# EAGLE board sensorBoard (EAGLE 7.6.0)
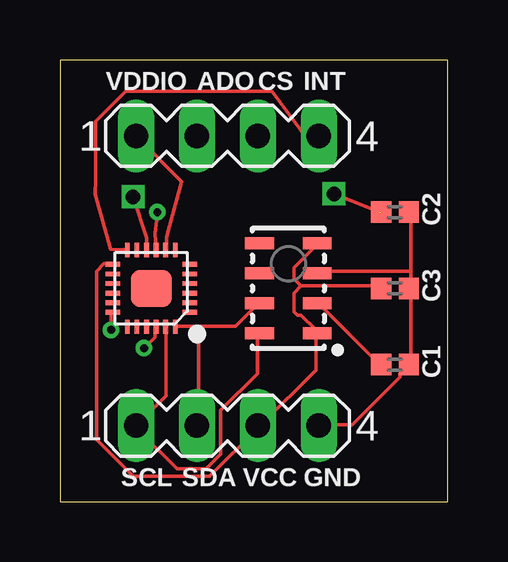
[diagram p0: board, top side]
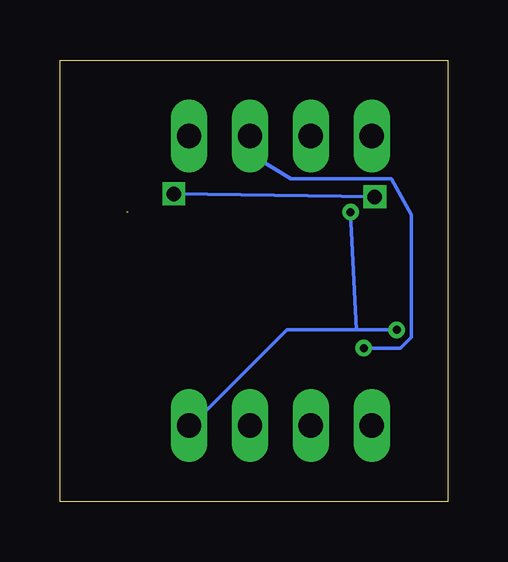
[diagram p1: board, bottom side, seen from below]

Size 16.18 x 18.41 mm. Coordinates in mm from the lower left corner, seen from the top.
Outline: 0,0 16.18,0 16.18,18.41 0,18.41 0,0
Copper layers (1*16): Top 0.0356mm / dielectric 1.5011mm / Bottom 0.0356mm
Design rules "LaenPCBOrder": minimum track width 6mil, minimum drill 13mil, track to track 6mil, track to pad 6mil, pad to pad 6mil, via to via 6mil, smd to smd 6mil, copper to edge 15mil, drill to drill 6mil, minimum pad ring 7mil, minimum via ring 7mil, stop-mask expansion 3mil, vias tented up to drill 0mil, thermal gap 10mil

## Footprints (pad centres in the part's own frame; a part is rotated, then mirrored left to right if it is on the bottom)
0402 = smd 0.85 x 0.9: 1 -0.58,0; 2 0.58,0
MA04-1 = drill 1.016 long: 1 -3.81,0; 2 -1.27,0; 3 1.27,0; 4 3.81,0
LGA-8 = smd 1.2 x 0.5: 1 -1.2,1.875; 2 -1.2,0.625; 3 -1.2,-0.625; 4 -1.2,-1.875; 5 1.2,-1.875; 6 1.2,-0.625; 7 1.2,0.625; 8 1.2,1.875
LEAD-QFN24 = smd 0.6 x 0.2: 1 -1.6,1; 2 -1.6,0.6; 3 -1.6,0.2; 4 -1.6,-0.2; 5 -1.6,-0.6; 6 -1.6,-1; 13 1.6,-1; 14 1.6,-0.6; 15 1.6,-0.2; 16 1.6,0.2; 17 1.6,0.6; 18 1.6,1 | smd 0.2 x 0.6: 7 -1,-1.6; 8 -0.6,-1.6; 9 -0.2,-1.6; 10 0.2,-1.6; 11 0.6,-1.6; 12 1,-1.6; 19 1,1.6; 20 0.6,1.6; 21 0.2,1.6; 22 -0.2,1.6; 23 -0.6,1.6; 24 -1,1.6 | smd 1.7 x 1.54: 25 0,0

## Placement (x,y rotation side)
C1  0.1uF  [0402]  13.97,5.71 0 top
C2  0.1uF  [0402]  13.97,12.06 0 top
C3  0.1uF  [0402]  13.97,8.89 0 top
J1  [MA04-1]  6.99,3.17 0 top
J3  [MA04-1]  6.99,15.24 0 top
U1  MPL3115A2  [LGA-8]  9.53,8.89 180 top
U2  MPU-9250  [LEAD-QFN24]  3.81,8.89 180 top

## Library data of the parts
C1-C3 = SparkFun-Capacitors; PROD_ID: CAP-12416
J1 J3 = con-lstb; OC_FARNELL: unknown; OC_NEWARK: unknown
U1 = SparkFun-Sensors; PROD_ID: IC-10869
U2 = invensense copy

## Nets
ADO/SDO: J3.2
CS: J3.3 U2.22
FSYNC: U2.11
GND: C1.2 C2.2 C3.2 J1.4 U1.3 U2.9 U2.18
INT: J3.4 U2.12
INT1: U1.6
INT2: U1.5
N$1: C1.1 U1.2
N$3: C2.1 U2.10
SCL: J1.1 U1.8 U2.23
SDA: J1.2 U1.7 U2.24
VCC: C3.1 J1.3 U1.1 U1.4 U2.13
VDDIO: J3.1 U2.8

## Tracks (layer width: path | path; a pad name or v marks a point on that pad's centre or on a via)
CS  (via drill 0.33)
  Top 0.152: v3.5,6.4 3.96,6.86 3.96,7.16 U2.22
  Bottom 0.152: v3.5,6.4 1.98,6.4 1.52,6.86 1.52,11.96 2.36,13.46 6.55,13.46 8.23,14.48 J3.3
GND  (via drill 0.33)
  Top 0.152: 14.63,9.6 14.63,8.99 C3.2 14.63,8.84 14.63,5.79 C1.2 14.48,5.64 14.17,5.33 14.17,5.18 12.19,3.2 10.82,3.2 J1.4 | 14.63,9.6 14.63,12.04 C2.2 | 14.63,9.6 10.82,9.6 U1.3 | v2.13,7.16 2.13,7.92 U2.18 | v4.06,12.06 3.96,11.18 U2.9
  Bottom 0.152: 3.81,7.16 6.71,7.16 10.67,3.2 J1.4 | 3.81,7.16 v2.13,7.16 | 3.81,7.16 v4.06,12.06
INT
  Top 0.152: U2.12 2.11,10.52 1.47,12.8 1.5,13.41 1.5,15.85 2.74,17.09 8.84,17.09 10.67,14.63 J3.4
N$1
  Top 0.152: C1.1 13.26,5.79 10.82,8.23 U1.2
N$3  (via drill 0.6)  (1 unrouted)
  Top 0.152: U2.10 3.61,10.99 v3.05,12.7 | v11.43,12.83 13.34,12.06
  Bottom 0.152: v3.05,12.7 v11.43,12.83
SCL
  Top 0.152: U2.23 4.42,7.16 4.42,4.42 J1.1 3.2,3.05 4.88,1.37 6.1,1.37 6.71,1.98 6.71,3.81 8.23,5.33 8.23,7.01 U1.8
SDA
  Top 0.152: 5.79,7.32 7.32,7.32 8.23,8.23 U1.7 | 5.79,7.32 4.88,7.32 U2.24 | 5.79,7.32 5.79,3.2 J1.2
VCC
  Top 0.152: 10.06,8.99 13.26,8.99 C3.1 | 10.06,8.99 9.75,9.3 9.75,9.75 10.67,10.67 U1.4 | 10.06,8.99 9.75,8.69 9.75,7.92 9.91,7.77 10.06,7.77 10.67,7.16 U1.1 10.67,7.01 10.67,5.49 8.38,3.2 J1.3 8.23,3.05 6.25,1.07 3.05,1.07 1.52,2.59 1.52,9.6 1.83,9.91 2.13,9.91 U2.13
VDDIO
  Top 0.152: U2.8 4.41,10.76 4.45,10.79 4.45,11.05 5.08,13.34 J3.1

## Text on the board
tNames: VDDIO | ADO | CS | INT | SCL | SDA | VCC | GND